# Altium PCB main.PcbDoc
Units mil, origin at the board's own origin, x right, y up, seen from the top; angles counter-clockwise.
Board outline 3045 x 1595 mil, 2 copper layers (Top Layer, Bottom Layer); 17 components, 11 nets, 59 pads, 0 vias.
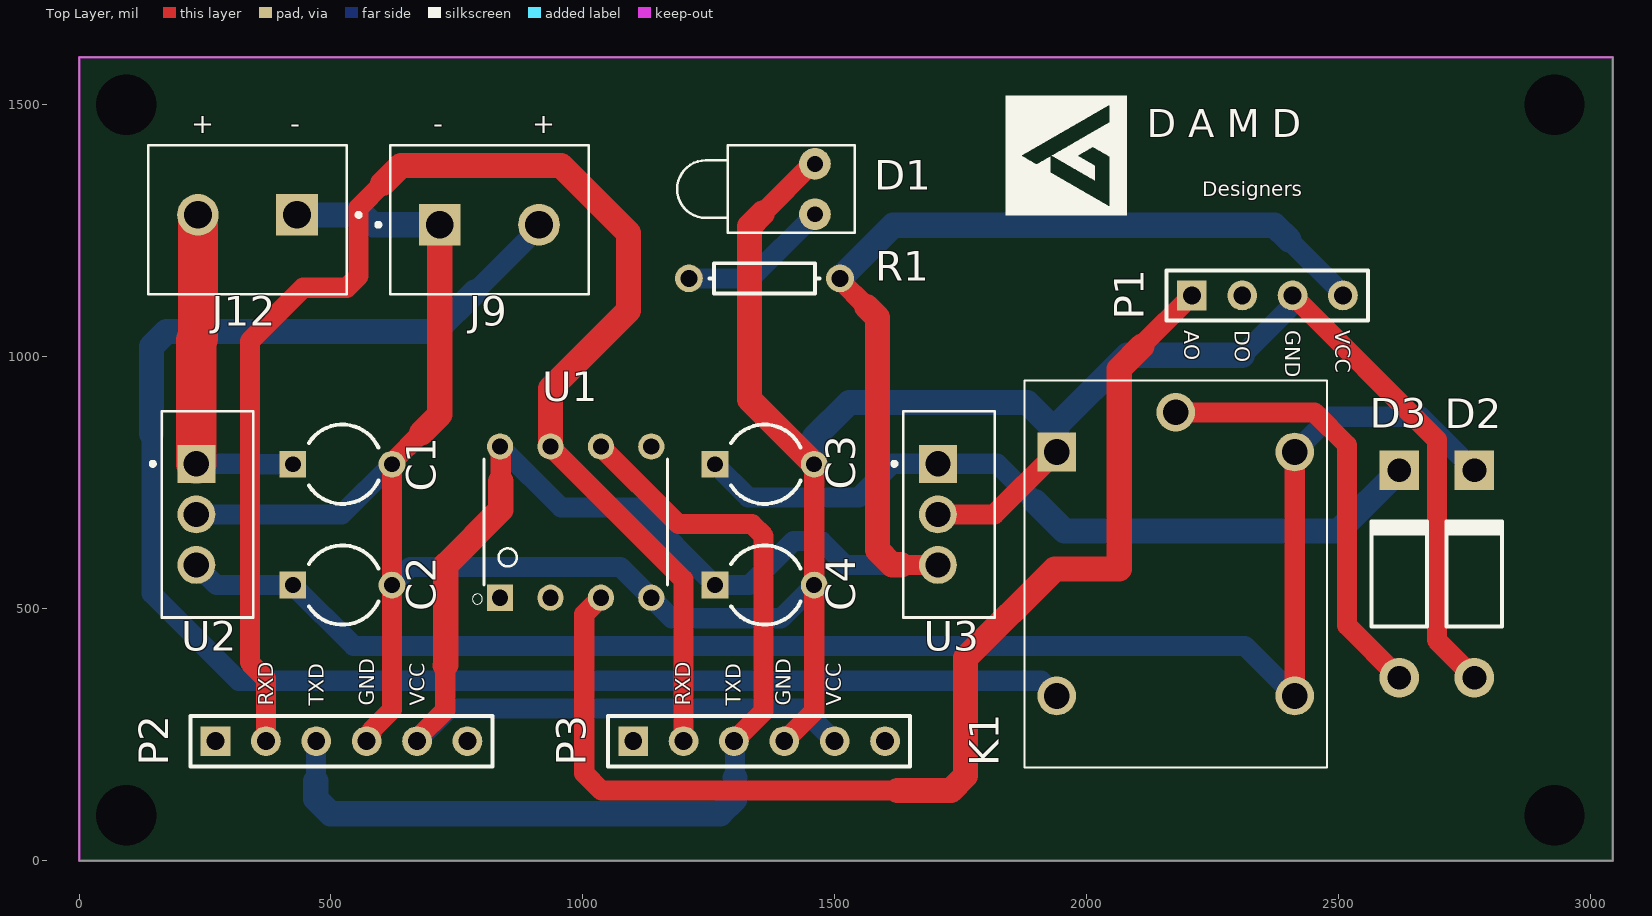
[diagram p0: Top Layer view]
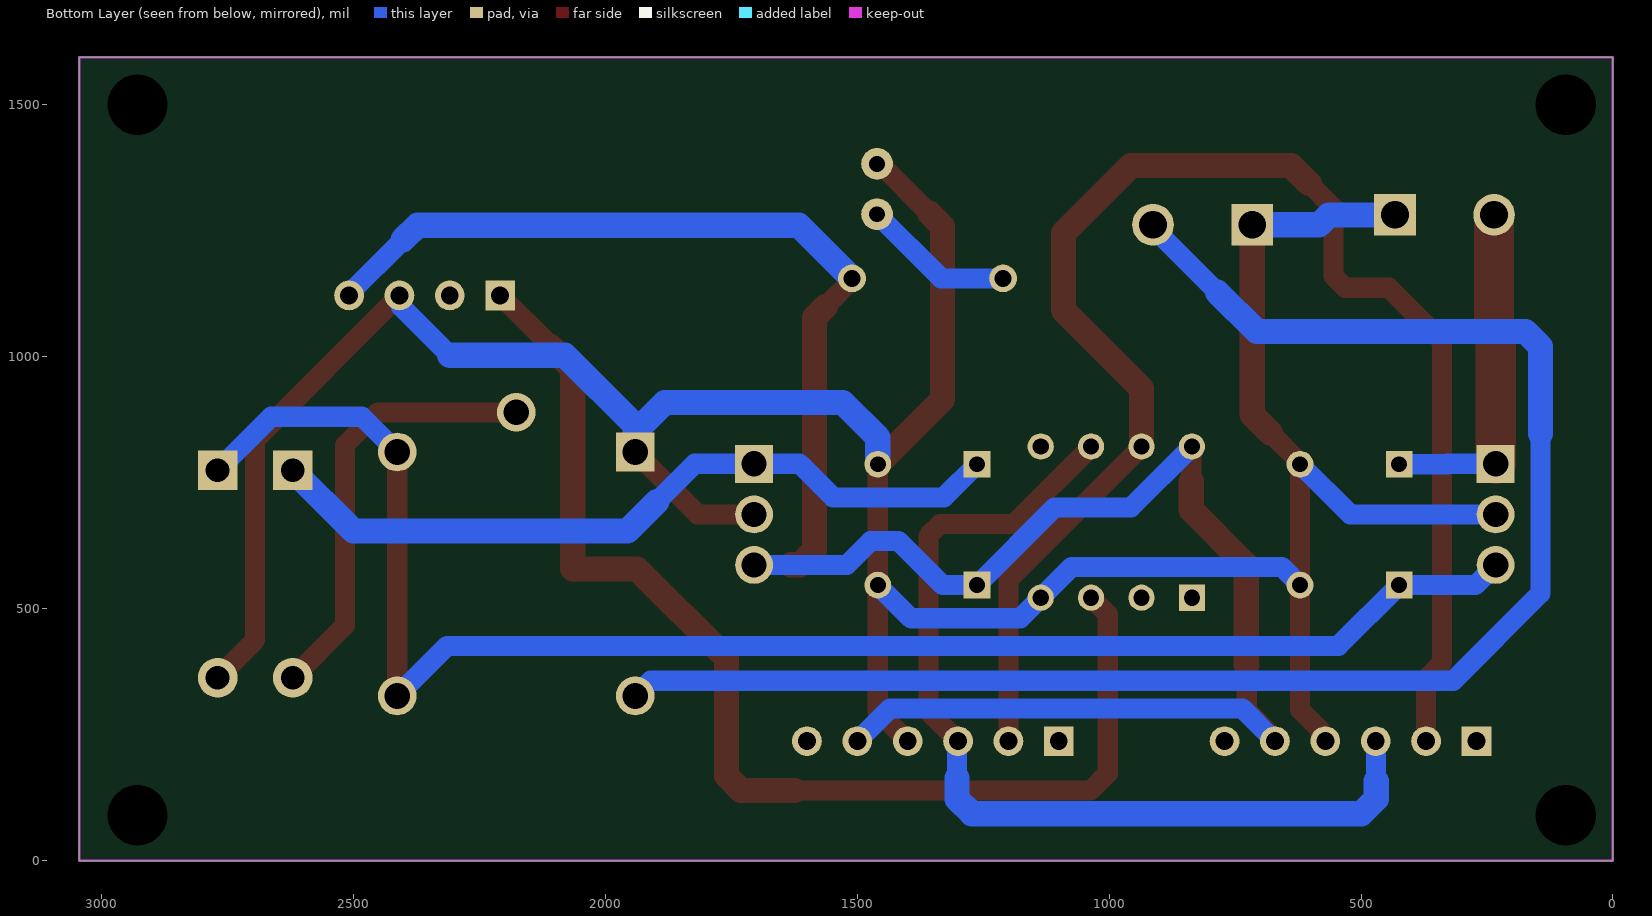
[diagram p1: Bottom Layer view, seen from below]

## Layer stack, top to bottom
Top Solder: solder mask 0.4, Solder Resist, Dk 3.5
Top Layer: signal copper 1.4
Dielectric 1: dielectric 12.6, FR-4, Dk 4.8
Bottom Layer: signal copper 1.4
Bottom Solder: solder mask 0.4, Solder Resist, Dk 3.5

## Board outline
0,0 3045,0 3045,1595 0,1595

## Design rules (kind name [scope] priority, off if disabled: settings)
Clearance [All] p1: gap=15 ignorepadtopadclearanceinfootprint=FALSE
MinimumAnnularRing [All] p1: minimumring=10
PolygonConnect [All] p1: connectstyle=Relief reliefconductorwidth=10 reliefentries=4 polygonreliefangle="90 Angle" airgapwidth=10
RoomDefinition main [InComponentClass('main')] p1: confinementstyle=ConfineIn formatcopy=TRUE lockcomponents=FALSE outline 9,10 3034,10 3034,1585 9,1585
RoutingVias [All] p1: holewidth=28 width=50 viastyle="Through Hole" minholewidth=28 minwidth=50 maxholewidth=28 maxwidth=50
SilkToSolderMaskClearance [IsText] p1: minsilkscreentomaskgap=10 clearancetoexposedcopper=TRUE
SolderMaskExpansion [All] p1: expansion=4 istentingtop=FALSE
Width [All] p1: maxlimit=100 minlimit=12 preferedwidth=40 minimp=50.000000 maximp=50.000000 favimp=50.000000
29 further rules are at their usual default settings.

## Components (designator, comment, footprint, x,y, rotation, side; value= is the part's Value field where it differs from the comment)
C1 "0.33uF" CAPR5-4X5 522.76,786.76 r0 top
C2 "0.1uF" CAPR5-4X5 522.76,546.76 r0 top
C3 "100uf 25V" CAPR5-4X5 1360.91,786.76 r0 top
C4 "2200uf 16V" CAPR5-4X5 1360.91,546.76 r0 top
D1 "LED1" LED-1 1460.91,1332.95 r180 top
D2 "Diode 1N4007" DO-41 2770,568.89 r90 top
D3 "Diode 1N4007" DO-41 2620.91,568.89 r90 top
J9 "9V Battery" HANDSON_KF301-2P 814.61,1262.08 r0 top (schematic designator J1)
J12 "12V Battery" HANDSON_KF301-2P 334.33,1281.76 r180 top (schematic designator J2)
K1 "9V RELAY" JQC3FT731Z12VDC 1940.91,811.02 r270 top
P1 "MQ135" HDR1X4 2209.09,1121.76 r0 top
P2 "HC-05 Bluetooth module" HDR1X6 270.91,237 r0 top
P3 "Header 6" HDR1X6 1100,237 r0 top
R1 "Res1" AXIAL-0.3 1360.59,1155.72 r0 top value=470ohm
U1 "ATTINY85-20PU" DIP762W46P254L927H533Q8B 985.91,671.76 r90 top
U2 "L7809CV" TO255P1040X460X1968-3 232.76,787.55 r270 top
U3 "L7805CV" TO255P1040X460X1968-3 1705,787.55 r270 top

## Footprints (in the part's own frame and the unit in brackets; to place one, negate y for a bottom-side part, rotate by r counter-clockwise, add the part's x,y. Pads: shape width x height; smd on the part's side, far side on the other; paste and mask are expansions set on the pad)
AXIAL-0.3 [mm] "Axial Device, Thru-Hole; 2 Leads; 0.3 in Pin Spacing"
  round 1.4 hole 0.85: 1(-3.81,0) 2(3.81,0)
  silkscreen extent -2.77,-0.76 2.77,0.76
CAPR5-4X5 [mm] "Capacitor; 2 Leads"
  rect 1.35x1.35 hole 0.8: 1(-2.5,0)
  round 1.35 hole 0.8: 2(2.5,0)
  silkscreen extent -1.69,-2 1.82,2
DIP762W46P254L927H533Q8B [mil]
  rect 52x52 hole 32: 1(-150,150)
  round 52 hole 32: 2(-150,50) 3(-150,-50) 4(-150,-150) 5(150,-150) 6(150,-50) 7(150,50) 8(150,150)
  silkscreen extent -163,-182 125,205, body extent -155,-182 155,182, height 98
DO-41 [mm] "Diode, Axial; Body 5.2 x 2.7 mm (LxDia. max), Lead Dia. 0.86 mm (max)"
  round 2 hole 1.2: 1(-5.23,0)
  rect 2x2 hole 1.2: 2(5.23,0)
  silkscreen extent -2.65,-1.41 2.75,1.4
HANDSON_KF301-2P [mm]
  rect 2.1x2.1 hole 1.4: 1(-2.5,0)
  round 2.1 hole 1.4: 2(2.5,0)
  silkscreen extent -5.7,-3.5 5,4
HDR1X4 [mm] "Connector; Header; 4 Position"
  rect 1.5x1.5 hole 0.9: 1(0,0)
  round 1.5 hole 0.9: 2(2.54,0) 3(5.08,0) 4(7.62,0)
  silkscreen extent -1.27,-1.27 8.89,1.27
HDR1X6 [mm] "Connector; Header; 6 Position"
  rect 1.5x1.5 hole 0.9: 1(0,0)
  round 1.5 hole 0.9: 2(2.54,0) 3(5.08,0) 4(7.62,0) 5(10.16,0) 6(12.7,0)
  silkscreen extent -1.27,-1.27 13.97,1.27
JQC3FT731Z12VDC [mm]
  rect 1.95x1.95 hole 1.3: 1(0,0)
  round 1.95 hole 1.3: 2(12.3,0) 3(12.3,12) 4(0,12) 5(-2,6)
  silkscreen extent -3.6,-1.62 15.9,13.62
LED-1 [mm] "LED; 2 Leads"
  round 1.6 hole 0.8: 1(0,1.27) 2(0,-1.27)
  silkscreen extent -2,-2.2 6.95,2.2
TO255P1040X460X1968-3 [mm]
  rect 1.91x1.91 / inner round 1.91 / far side rect 1.91x1.91 hole 1.27: 1(0,0)
  round 1.91 hole 1.27: 2(2.55,0) 3(5.1,0)
  silkscreen extent -2.65,-2.29 7.75,2.86, body extent -4.98,-1.76 4.98,2.69, height 19.68

## Part data
C1 C2 C3 C4: library part Cap2, "Capacitor", PackageDescription="Capacitor; 2 Leads", PackageReference=CAPR5-4X5, Published=23-Sep-2002, Publisher="Altium Limited"
D1: "Typical RED GaAs LED", LatestRevisionDate=08-Jul-2005, LatestRevisionNote="Mech Layer 1 removed.", PackageDescription="LED; 2 Leads", PackageReference=LED-1, Published=8-Jun-2000, Publisher="Altium Limited"
D2 D3: "1 Amp General Purpose Rectifier", Code_JEDEC=DO-204-AL, ComponentLink1Description="Manufacturer Link", ComponentLink1URL=http://www.fairchildsemi.com/, ComponentLink2Description=Datasheet, ComponentLink2URL=http://www.fairchildsemi.com/ds/1N%2F1N4001.pdf, DatasheetVersion=1998, LatestRevisionDate=17-Jul-2002, LatestRevisionNote="Re-released for DXP Platform.", PackageDescription="Diode, Axial; Body 5.2 x 2.7 mm (LxDia. max), Lead Dia. 0.86 mm (max)", PackageReference=DO-41, PackageVersion=Aug-1999, Published=8-Jun-2000, Publisher="Altium Limited"
J9 J12: library part KF301-2P, "2 Pin Terminal Block 5mm Pitch", Package=None, Availability=Unavailable, MP=KF301-2P, Price=None
K1: library part JQC-3F-_T73_-1Z-12VDC, "RELAY POWER 10A 12VDC 1C PCB TYPE (JS1) 5PIN QIANJ", Manufacturer_Name=QIANJI, Manufacturer_Part_Number=JQC-3F-(T73)-1Z-12VDC, Datasheet Link=https://img.ozdisan.com/ETicaret_Dosya/341245_8627675.pdf, Geometry.Height=15.5mm
P1: library part "Header 4", "Header, 4-Pin", LatestRevisionDate=17-Jul-2002, LatestRevisionNote="Re-released for DXP Platform.", Publisher="Altium Limited"
P2: library part "Header 6", "Header, 6-Pin", LatestRevisionDate=17-Jul-2002, LatestRevisionNote="Re-released for DXP Platform.", Publisher="Altium Limited"
P3: "Header, 6-Pin", LatestRevisionDate=17-Jul-2002, LatestRevisionNote="Re-released for DXP Platform.", Publisher="Altium Limited"
R1: "Resistor", LatestRevisionDate=17-Jul-2002, LatestRevisionNote="Re-released for DXP Platform.", PackageDescription="Axial Device, Thru-Hole; 2 Leads; 0.3 in Pin Spacing", PackageReference=AXIAL-0.3, Published=8-Jun-2000, Publisher="Altium Limited"
U1: "AVR AVRÂ® ATtiny, Functional Safety (FuSa) Microcontroller IC 8-Bit 20MHz 8KB (4K x 16) FLASH 8-PDIP", Package="DIP-8 Atmel", Availability=Good, Check_prices=https://www.snapeda.com/parts/ATTINY85-20PU/Microchip/view-part/42827/?ref=eda, MF=Microchip, MP=ATTINY85-20PU, Price=None, Purchase-URL=https://pricing.snapeda.com/search/part/ATTINY85-20PU/?ref=eda, SnapEDA_Link=https://www.snapeda.com/parts/ATTINY85-20PU/Microchip/view-part/42827/?ref=snap
U2: library part L7805CV, "Linear Voltage Regulator IC Positive Fixed 1 Output 1.5A TO-220", Package="TO-220-3 ON Semiconductor", Availability="In Stock", Check_prices=https://www.snapeda.com/parts/L7805CV/STMicroelectronics/view-part/?ref=eda, MF=STMicroelectronics, MP=L7805CV, Price=None, Purchase-URL=https://pricing.snapeda.com/search/part/L7805CV/?ref=eda, SnapEDA_Link=https://www.snapeda.com/parts/L7805CV/STMicroelectronics/view-part/?ref=snap
U3: "Linear Voltage Regulator IC Positive Fixed 1 Output 1.5A TO-220", Package="TO-220-3 ON Semiconductor", Availability="In Stock", Check_prices=https://www.snapeda.com/parts/L7805CV/STMicroelectronics/view-part/?ref=eda, MF=STMicroelectronics, MP=L7805CV, Price=None, Purchase-URL=https://pricing.snapeda.com/search/part/L7805CV/?ref=eda, SnapEDA_Link=https://www.snapeda.com/parts/L7805CV/STMicroelectronics/view-part/?ref=snap

## Free pads (board coordinates)
  round 60 hole 120 unplated: 2(94,90) 2(94,1500) 2(2929,90) 2(2929,1500)

## Nets (pads, with @x,y where several pads share a name; then routed paths per layer and width w, separated by ;. In a path a pad name is that pad's centre, name@x,y a point inside that pad or via, vN(x,y) a via of type N, cw(c..) or ccw(c..) an arc to the next point about the centre after c; other vN are vias at no path point)
"12V to 9V reg": C2.1 D2.2 K1.3 K1.4 U2.3 | length 3202.2
  Top Layer w40: K1.3 K1.4
  Bottom Layer w40: U2.3 272.76,546.76 C2.1 545.1,426 2314.11,426 K1.3 ; K1.4 2483.33,881 2663.79,881 D2.2
+5V: C4.1 P1.4 P2.5 P3.5 R1.2 U1.8 U3.3 | length 4379.9
  Top Layer w40: P2.5 670.91,242.16 727,298.25 727,387 ; U1.8 837,820.67 837,753 ; R1.2 1510.59,1152.41 1563,1100 ; 1632,586.77 U3.3
  Top Layer w50: 727,387 728,388 728,587 837,696 837,753 ; 1563,1100 1585,1078 1585,616.29 1614.29,587 1631.77,587 1632,586.77
  Bottom Layer w40: P2.5 735.91,302 1435,302 P3.5 ; U1.8 956.67,701 1108.25,701 C4.1 1330.76,546.76 1418,634 1473.77,634 1521,586.77 U3.3 ; 2401.74,1232.44 2509.09,1125.09 P1.4
  Bottom Layer w50: R1.2 1615.87,1261 2373.18,1261 2401.74,1232.44
+9V: J9.2 K1.2 | length 3244.4
  Bottom Layer w40: 144,847.34 144,530 317,357 1910.67,357 K1.2 ; 785,1128 913.03,1256.03 J9.2
  Bottom Layer w50: 144,847.34 144,1020.71 173.29,1050 707,1050 785,1128
+12V: C1.1 J12.2 U2.1 | length 687.4
  Top Layer w40: 232.76,1033 235.91,1036.15
  Top Layer w80: U2.1 232.76,1033 ; 235.91,1036.15 J12.2
  Bottom Layer w40: U2.1 328,787.55 328.79,786.76 C1.1
Aout: P1.1 U1.3 | length 2360.1
  Top Layer w40: U1.3 1003,488.86 1003,173 1037,139 1625,139 ; 2110,1021 2110,1022.67 P1.1
  Top Layer w50: 1625,139 1730.71,139 1760,168.29 1760,402 1937,579 2065,579 2065,976 2110,1021
GND: C1.2 C2.2 C3.2 C4.2 D1.2 D2.1 J9.1 J12.1 K1.1 P1.3 P2.4 P3.4 U1.4 U2.2 U3.2 | length 6418.4
  Top Layer w40: P2.4 570.91,242.16 580.43,251.68 580.43,258.43 621.18,299.18 C2.2 C1.2 621.18,790.18 680,849 ; 1357,1285 1454.95,1382.95 D1.2 ; P3.4 1459.33,296.33 C4.2 C3.2 ; U3.2 1817.05,687.16 K1.1 ; P1.3 2695.45,835.4 2695.45,437.53 D2.1
  Top Layer w50: 680,849 716.18,885.18 J9.1 ; 1357,1285 1331,1259 1331,915.1 C3.2
  Bottom Layer w40: U2.2 521.58,687.16 C1.2 ; C2.2 657.42,583 1074.67,583 U1.4 1176.67,481 1393.57,481 C4.2 ; 2309,1003 2405.45,1099.45 2405.45,1118.12 P1.3
  Bottom Layer w50: J12.1 564,1281.76 583.68,1262.08 J9.1 ; C3.2 1459.33,839.34 1528.99,909 1882.35,909 1940.91,850.44 K1.1 ; 1940.91,863.59 2080.32,1003 2309,1003
NetD1_1: D1.1 R1.1 | length 303
  Bottom Layer w40: R1.1 1333.68,1155.72 D1.1
NetD3_1: D3.1 K1.5 | length 871.8
  Top Layer w40: K1.5 2452.24,889.76 2517,825 2517,466.89 D3.1
relayout: C3.1 D3.2 U3.1 | length 1518.9
  Bottom Layer w40: C3.1 1328.25,721 1548,721 1614.55,787.55 U3.1 1823,787.55 1897.51,713.04 1897.51,712.57
  Bottom Layer w50: 1897.51,712.57 1956.08,654 2500.11,654 D3.2
RX: P2.2 P3.2 U1.7 | length 3021.3
  Top Layer w40: P2.2 370.91,361.09 339,393 339,1031 445,1137 531.57,1137 555,1160.43 555,1296 603,1344 ; U1.7 1200,557.67 P3.2
  Top Layer w50: 603,1344 639,1380 957,1380 1091,1246 1091,1092 935.91,936.91 U1.7
TX: P2.3 P3.3 U1.6 | length 1915.4
  Top Layer w40: U1.6 1189.67,668 1335.57,668 1359,644.57 1359,296 P3.3
  Bottom Layer w40: 470,158 470,236.09 P2.3 ; P3.3 1302,235 1302,164
  Bottom Layer w50: 470,158 470,122.29 499.29,93 1272.71,93 1302,122.29 1302,164
pads on no net: P1.2 P2.1 P2.6 P3.1 P3.6 U1.1 U1.2 U1.5

## Keep-outs
Keep-Out Layer:
  the board outline again, w5

## Silkscreen, mask and mechanical layers (free items; w line width, h text height)
Top Overlay:
  region: 1237 vertices and 1 holes, not listed, extent 1840.07,1280.7 2080.04,1517.98
  text "+" at 222.58,1443.34 h40
  text "-" at 419.43,1443.34 h40
  text "-" at 702.86,1443.34 h40
  text "+" at 899.71,1443.34 h40
  text "D A M D" at 2120.04,1417.31 h95
  text "Designers" at 2230.04,1308.36 h50
  text "AO" at 2194.1,1052.82 h30 r270
  text "DO" at 2294.1,1052.82 h30 r270
  text "GND" at 2394.1,1052.82 h30 r270
  text "VCC" at 2494.1,1052.82 h30 r270
  text "RXD" at 385.9,307.18 h30 r90
  text "TXD" at 485.9,307.18 h30 r90
  text "GND" at 585.9,307.18 h30 r90
  text "VCC" at 685.9,307.18 h30 r90
  text "RXD" at 1213.26,307.18 h30 r90
  text "TXD" at 1313.26,307.18 h30 r90
  text "GND" at 1413.26,307.18 h30 r90
  text "VCC" at 1513.26,307.18 h30 r90